# Altium PCB PCB1_FL.PcbDoc
Units mil, origin at the board's own origin, x right, y up, seen from the top; angles counter-clockwise.
Board outline 2000 x 500 mil, 2 copper layers (L1, L2), stack 62.8 mil thick; 5 components, 4 nets, 13 pads, 1 vias.
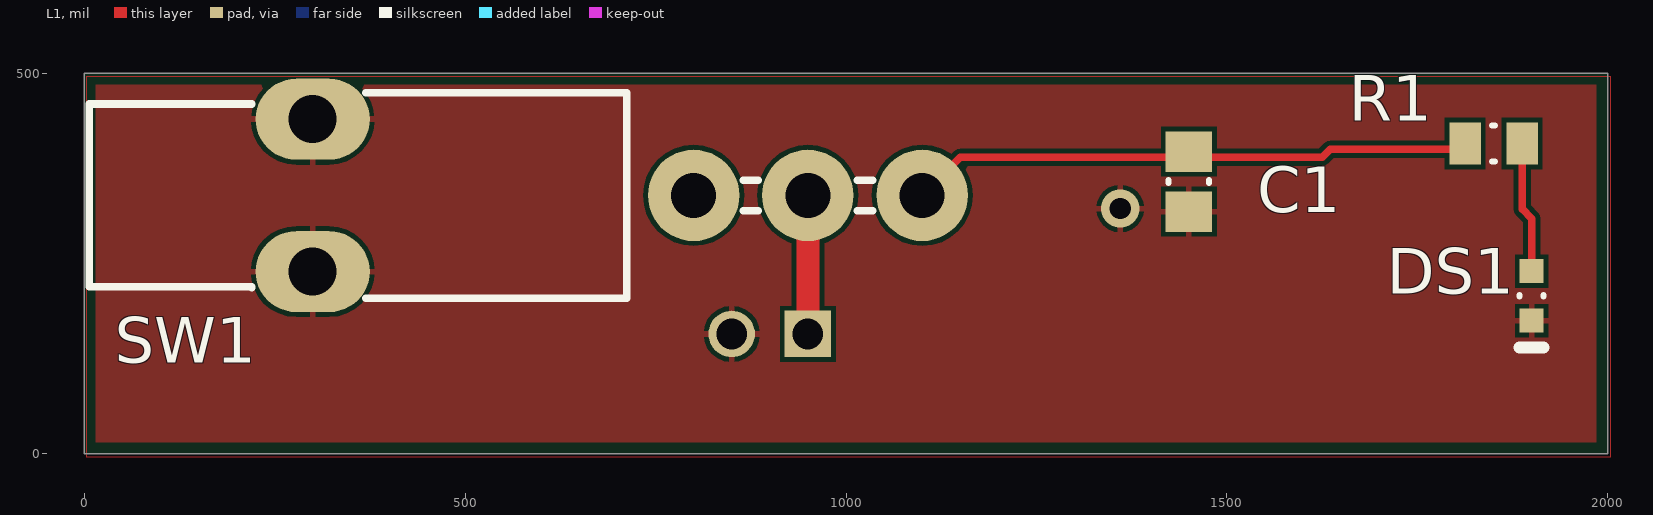
[diagram p0: L1 view]
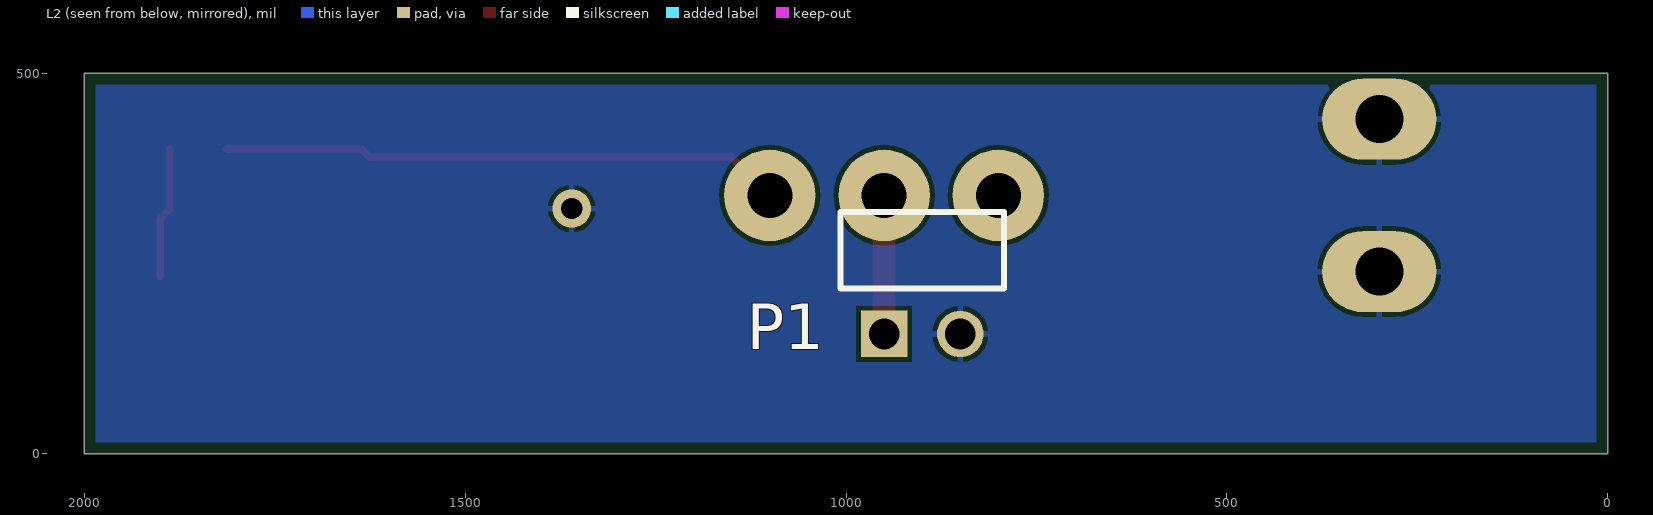
[diagram p1: L2 view, seen from below]

## Layer stack, top to bottom
Top Solder: solder mask 0.1, Solder Resist, Dk 0
L1: signal copper 1.4
Core: dielectric 60, FR-4, Dk 4.6
L2: signal copper 1.4
Bottom Solder: solder mask 0.1, Solder Resist, Dk 0

## Board outline
0,0 2000,0 2000,500 0,500

## Design rules (kind name [scope] priority, off if disabled: settings)
BoardOutlineClearance [All] p1: gap=15 ignorepadtopadclearanceinfootprint=FALSE
Clearance [All] p1: gap=6 ignorepadtopadclearanceinfootprint=FALSE except(0: Arc-Hole Track-Hole SMDPad-Hole THPad-Hole Via-Hole Fill-Hole Poly-Hole Region-Hole Text-Hole)
ComponentClearance [All] p1: gap=1 collisioncheckmode=3 verticalgap=1 showdistances=FALSE
DiffPairsRouting [All] p1: maxlimit=393.7 minlimit=6 mostfreqgap=8 toplayer_minwidth=6 toplayer_maxwidth=15 toplayer_prefwidth=8 bottomlayer_minwidth=6 bottomlayer_maxwidth=15 bottomlayer_prefwidth=8 maxuncoupledlength=500
HoleSize [All] p1: absolutevalues=TRUE maxlimit=265 minlimit=13 maxpercent=80.000 minpercent=20.000
HoleToHoleClearance [All] p1: gap=10 allowstackedmicrovias=FALSE
MinimumAnnularRing [All] p1: minimumring=7
MinimumSolderMaskSliver [All] p1: minsoldermaskwidth=0
PlaneClearance [All] p1: clearance=10
PlaneConnect [All] p1: planeconnectstyle=Direct reliefexpansion=16 reliefentries=4 reliefconductorwidth=6 reliefairgap=6
PolygonConnect [All] p1: connectstyle=Relief reliefconductorwidth=8 reliefentries=4 polygonreliefangle="90 Angle" airgapwidth=6
RoutingCorners [All] p1: cornerstyle=45-Degree minsetback=49.21 maxsetback=49.21
RoutingVias [All] p1: holewidth=15 width=30 viastyle="Through Hole" minholewidth=13 minwidth=27 maxholewidth=100 maxwidth=114
SilkToSilkClearance [All] p1: silktosilkclearance=0
SilkToSolderMaskClearance [IsPad] p1: minsilkscreentomaskgap=6 clearancetoexposedcopper=TRUE
SolderMaskExpansion [All] p1: expansion=2.95
Width [All] p1: maxlimit=400 minlimit=6 preferedwidth=8
20 further rules are at their usual default settings.

## Classes and differential pairs
component class Sheet1_FL: C1 DS1 P1 R1

## Components (designator, comment, footprint, x,y, rotation, side; value= is the part's Value field where it differs from the comment)
C1 "CAP 1.5uF 6.3V 0805(2012)" CAPC0805(2012)100_M 1450,357.52 r90 top value=1.5uF
DS1 "APT1608SGC" KING-APT1608SGC_V 1900,207.52 r270 top
P1 "TSW-102-08-F-S-RA" SMTC-TSW-102-08-X-S-RA 950,157.52 r180 bottom
R1 "390R 5% 0805(2012)" RESC0805(2012)_N 1850,407.52 r180 top value="390.00 Ohm"
SW1 "T8019L-TNQ" SALE-T8019L-5_V 7.01,339.37 r270 top

## Footprints (in the part's own frame and the unit in brackets; to place one, negate y for a bottom-side part, rotate by r counter-clockwise, add the part's x,y. Pads: shape width x height; smd on the part's side, far side on the other; paste and mask are expansions set on the pad)
CAPC0805(2012)100_M [mm] "Chip Capacitor, Body 2.0x1.2mm, Height 1.0mm, IPC Low Density"
  rect 1.35x1.55 smd: 1(-1,0) 2(1,0)
  silkscreen extent -0.05,-0.67 0.05,0.67, body extent -1.1,-0.72 1.1,0.72, height 1
KING-APT1608SGC_V [mm] "SMD, 2-Leads, Body 0.8x1.6mm"
  rect 0.8x0.8 smd: 1(-0.825,0) 2(0.825,0)
  silkscreen extent -0.02,-0.4 1.73,0.4, body extent -0.8,-0.4 0.81,0.4, height 0.76
RESC0805(2012)_N [mm] "Chip Resistor, Body 2.0x1.3mm, IPC Medium Density"
  rect 1.05x1.4 smd: 1(-0.95,0) 2(0.95,0)
  silkscreen extent -0.05,-0.6 0.05,0.6, body extent -1.1,-0.67 1.1,0.68, height 0.7
SALE-T8019L-5_V [mm] "Toggle Switch, 3 Leads, Vertical Right Angle"
  round 3.048 hole 1.5: 1(0,20.142) 2(0,23.952) 3(0,27.762)
  oval 2.7x3.81 hole 1.6: S1(2.54,7.442) S2(-2.54,7.442)
  silkscreen extent -3.43,0 3.43,26.11, body extent -3.5,-8.38 3.5,28.01, height 13
SMTC-TSW-102-08-X-S-RA [mm] ".025 SQ Post Terminal Strip Assembly, 1x2 Pins, Right Angle, 2.54mm Pitch, Male"
  rect 1.55x1.55 hole 1.02: 1(0,0)
  round 1.55 hole 1.02: 2(2.54,0)
  silkscreen extent -1.46,1.52 4,4.06, body extent -1.27,-0.32 3.81,9.9, height 3.05

## Part data
C1: library part CMP-1036-04785-1, "CAP 1.5uF 6.3V ±20% 0805 (2012 Metric) Thickness 1mm SMD", Case-EIA=0805, Case-Metric=2012, Rated Voltage="6.3 V", Tolerance=±20%, Max Thickness="1 mm", Technology=SMT
DS1: library part CMP-2000-05789-1, "Super Bright Green LED, 62.5 mW, 25 mA, -40 to 85 degC, 2-Pin SMD, RoHS, Tape and Reel", Color=Green, Current - Test=20mA, Manufacturer=Kingbright, Millicandela Rating=15mcd, Package / Case=0603(1608Metric), Package Description="2-Pin Surface Mount Device, Body 0.8 x 1.6 mm", Standard Package=2,000, Voltage - Forward (Vf) (Typ)=2.2V, 3D Model="APT1608x.sldprt /  / APT1608x.pro /  / APT1608x.igs /  / APT1608x.stp", Catalog Drawings="APT1608SeriesTop /  / APT1608SeriesSide", Category=Optoelectronics, Datasheet URL=https://datasheet.ciiva.com/2113/apt1608sgc-2113808.pdf, Datasheet Version="Rev. 16B, 02/2012", Family=LEDIndication-Discrete, Height=0.75mm, Lens Style/Size=RectanglewithFlatTop,1.2mmx0.8mm, Lens Type=Clear, Manufacturer URL=http://www.kingbright.com/, Mounting Technology=SurfaceMount, Mounting Type=SurfaceMount, Online Catalog=0603RectanglewithFlatTopChipLEDs, Other Names=754-1121-2, Package Reference=APT1608SGC, Packaging=Tape&Reel(TR), Size / Dimension=1.60mmLx0.80mmW, Viewing Angle=120°, Wavelength - Dominant=568nm, Wavelength - Peak=565nm
P1: library part CMP-1024-00321-1, "0.025\" SQ Post Header, Through-hole, Right Angle, -55 to 125 degC, 2.54 mm Pitch, 2-Pin, Male, RoHS", Manufacturer=Samtec, Temperature Range="-55 to 125 degC", ComponentLink1Description="Manufacturer URL", ComponentLink1URL=http://www.samtec.com, ComponentLink2Description=Datasheet, ComponentLink2URL=http://www.samtec.com/documents/webfiles/pdf/TSW_TH.PDF, ComponentLink3Description="Package Specification", ComponentLink3URL=http://www.samtec.com/documents/webfiles/cpdf/TSW-XXX-XX-XXX-X-XX-XXX-MKT.pdf, DatasheetVersion=F-214, Mounting Technology=Through-hole, Orientation="Right Angle", PackageDescription=".025[0.64] SQ. Post Terminal Strip Assembly", PackageReference=TSW-102-08-X-S-RA, PackageVersion="DM, 8/1988", PartNumber=TSW-102-08-F-S-RA, Pitch="2.54 mm", RoHS=True
R1: library part CMP-1013-00064-1, "390R 0.125W 5% 0805 (2012 Metric)  SMD", Case-EIA=0805, Case-Metric=2012, Power="0.125 W", Tolerance="5 %", Technology=SMT
SW1: library part CMP-0428-00001-1, "Toggle Switch, SPDT, Through Hole, 3 Terminals", Manufacturer="Salecom Electronics", Operating Temperature="-30 to +85 degC", ComponentLink1Description="Manufacturer URL", ComponentLink1URL=http://www.salecom.com/, ComponentLink2Description=Datasheet, ComponentLink2URL=http://www.salecom.com/pdf/toggle%20switch_T80-T.pdf, DatasheetVersion=Jul-12, Mechanical Life="50,000 cycles", Mounting Technology="Through Hole", PackageDescription="Toggle Switch, 3 Leads, Vertical Right Angle", PackageReference=T8019L, PartNumber=T8019L-TNQ

## Via types
v1: diameter 50, hole 28, L1 to L2, 1 vias

## Nets (pads, with @x,y where several pads share a name; then routed paths per layer and width w, separated by ;. In a path a pad name is that pad's centre, name@x,y a point inside that pad or via, vN(x,y) a via of type N, cw(c..) or ccw(c..) an arc to the next point about the centre after c; other vN are vias at no path point)
3V: P1.1 SW1.2 | length 189.4
  L1 w30: P1.1@950,150 SW1.2
GND: C1.1 DS1.2 P1.2 SW1.S1 SW1.S2
  other v1: 1360,322.15
NetC1_2: C1.2 R1.2 SW1.3 | length 737.7
  L1 w10: SW1.3 1150,389.37 1450,389.37 1625,389.37 1635.63,400 R1.2@1812.6,400
NetDS1_1: DS1.1 R1.1 | length 172.7
  L1 w10: R1.1@1887.4,400 1887.4,321.6 1900,309 DS1.1@1900,232.48
pads on no net: SW1.1

## Polygon pours and split planes (outlines as drawn)
GND on L1 "Top Layer-GND" (solid, remove dead copper, pour order 7): 14.96,-5.04 14.96,494.96 2014.96,494.96 2014.96,-5.04
no net on L1 "Top Layer-No Net 2" (solid, remove dead copper, pour order 3): 3.28,-4.5 3.28,495.5 2003.28,495.5 2003.28,-4.5
no net on L1 "Top Layer-No Net 1" (solid, pour order 5): 20,10
no net on L1 "Top Layer-No Net" (solid, pour order 0): 1300,175.04
GND on L2 "Bottom Layer-No Net" (solid, pour order 9): 0,0 0,500 2000,500 2000,0

## Silkscreen, mask and mechanical layers (free items; w line width, h text height)
Mechanical 1:
  lines w10: 0,0 2000,0 2000,500 0,500 0,170 0,0